# Altium PCB inKard-Link.PcbDoc
Units mil, origin at the board's own origin, x right, y up, seen from the top; angles counter-clockwise.
Board outline 700 x 280 mil, 2 copper layers (Top Layer, Bottom Layer); 2 components, 6 nets, 12 pads, 0 vias.
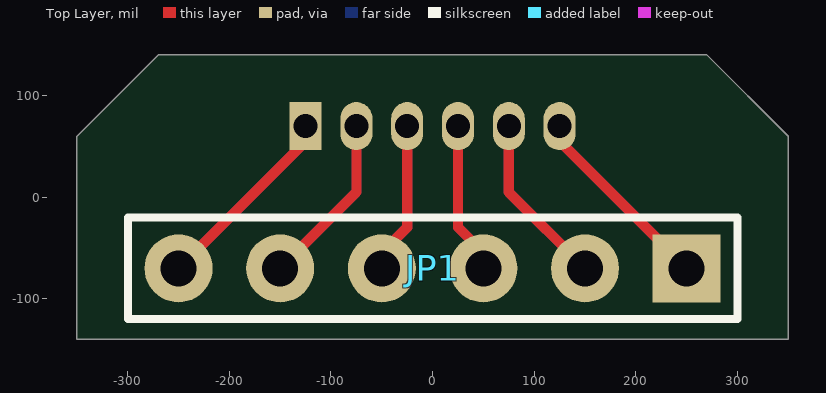
[diagram p0: Top Layer view]
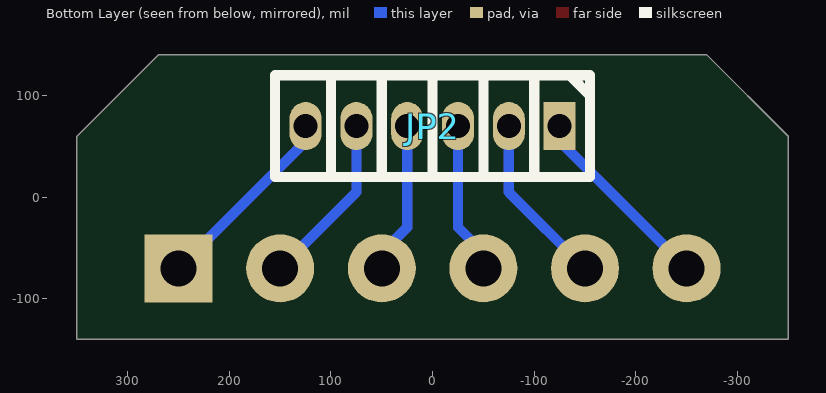
[diagram p1: Bottom Layer view, seen from below]

## Layer stack, top to bottom
Top Solder: solder mask 0.4, Solder Resist, Dk 3.5
Top Layer: signal copper 1.4
Dielectric 1: dielectric 12.6, FR-4, Dk 4.8
Bottom Layer: signal copper 1.4
Bottom Solder: solder mask 0.4, Solder Resist, Dk 3.5

## Board outline
-350,-140 350,-140 350,60 270,140 -270,140 -350,60

## Design rules (kind name [scope] priority, off if disabled: settings)
Clearance [All] p1: gap=10 ignorepadtopadclearanceinfootprint=FALSE except(0: Arc-Hole Track-Hole SMDPad-Hole THPad-Hole Via-Hole Fill-Hole Poly-Hole Region-Hole Text-Hole)
PolygonConnect [All] p1: connectstyle=Relief reliefconductorwidth=10 reliefentries=4 polygonreliefangle="90 Angle" airgapwidth=10
RoutingVias [All] p1: holewidth=28 width=50 viastyle="Through Hole" minholewidth=28 minwidth=50 maxholewidth=28 maxwidth=50
SolderMaskExpansion [All] p1: expansion=4
Width [All] p1: maxlimit=10 minlimit=10 preferedwidth=10
30 further rules are at their usual default settings.

## Components (designator, comment, footprint, x,y, rotation, side; value= is the part's Value field where it differs from the comment)
JP1 "HDR-1X6" HDR2.54-M-LI-6P 0,-70 r180 top
JP2 "HDR-1X6" HDR1.27-LI-6P 0,70 r0 bottom

## Footprints (in the part's own frame and the unit in brackets; to place one, negate y for a bottom-side part, rotate by r counter-clockwise, add the part's x,y. Pads: shape width x height; smd on the part's side, far side on the other; paste and mask are expansions set on the pad)
HDR1.27-LI-6P [mm] "直插，脚距：1.27mm"
  rect 0.8x1.2 hole 0.6: 1(-3.175,0)
  oval 0.8x1.2 hole 0.6: 2(-1.905,0) 3(-0.635,0) 4(0.635,0) 5(1.905,0) 6(3.175,0)
  silkscreen extent -3.94,-1.27 3.94,1.27, body extent -3.81,-1.2 3.81,1.2, height 4.48
HDR2.54-M-LI-6P [mm] "排母，6脚"
  rect 1.7x1.7 hole 0.9: 1(-6.35,0)
  round 1.7 hole 0.9: 2(-3.81,0) 3(-1.27,0) 4(1.27,0) 5(3.81,0) 6(6.35,0)
  silkscreen extent -7.62,-1.27 7.62,1.27, body extent -7.62,-1.27 7.62,1.27, height 8.5

## Part data
JP1 JP2: library part "Header 6", "6P接插件"
  JP1: BOM名称=6P接, 学习资源=www.ooocke.

## Nets (pads, with @x,y where several pads share a name; then routed paths per layer and width w, separated by ;. In a path a pad name is that pad's centre, name@x,y a point inside that pad or via, vN(x,y) a via of type N, cw(c..) or ccw(c..) an arc to the next point about the centre after c; other vN are vias at no path point)
NetJP1_1: JP1.1 JP2.6 | length 383.6
  Top Layer w10: JP2.6 125,55 JP1.1
  Bottom Layer w10: JP2.6 125,55 JP1.1
NetJP1_2: JP1.2 JP2.5 | length 342.1
  Top Layer w10: JP2.5 75,5 JP1.2
  Bottom Layer w10: JP2.5 75,5 JP1.2
NetJP1_3: JP1.3 JP2.4 | length 300.7
  Top Layer w10: JP2.4 25,-29.6 50,-54.6 JP1.3
  Bottom Layer w10: JP2.4 25,-29.6 50,-54.6 JP1.3
NetJP1_4: JP1.4 JP2.3 | length 300.7
  Top Layer w10: JP1.4 -50,-54.6 -25,-29.6 JP2.3
  Bottom Layer w10: JP1.4 -50,-54.6 -25,-29.6 JP2.3
NetJP1_5: JP1.5 JP2.2 | length 342.1
  Top Layer w10: JP1.5 -75,5 JP2.2
  Bottom Layer w10: JP1.5 -75,5 JP2.2
NetJP1_6: JP1.6 JP2.1 | length 383.6
  Top Layer w10: JP1.6 -125,55 JP2.1
  Bottom Layer w10: JP1.6 -125,55 JP2.1

## Silkscreen, mask and mechanical layers (free items; w line width, h text height)
Mechanical 1:
  lines w10: -350,-140 350,-140 350,60 270,140 0,140 -270,140 -350,60 -350,-140